# Altium PCB USB_Switch_Board.PcbDoc (part 1 of 2)
Units mm, origin at the board's own origin, x right, y up, seen from the top; angles counter-clockwise.
Board outline 83 x 30 mm, 2 copper layers (Top Layer, Bottom Layer), stack 1.554 mm thick; 73 components, 34 nets, 215 pads, 199 vias.
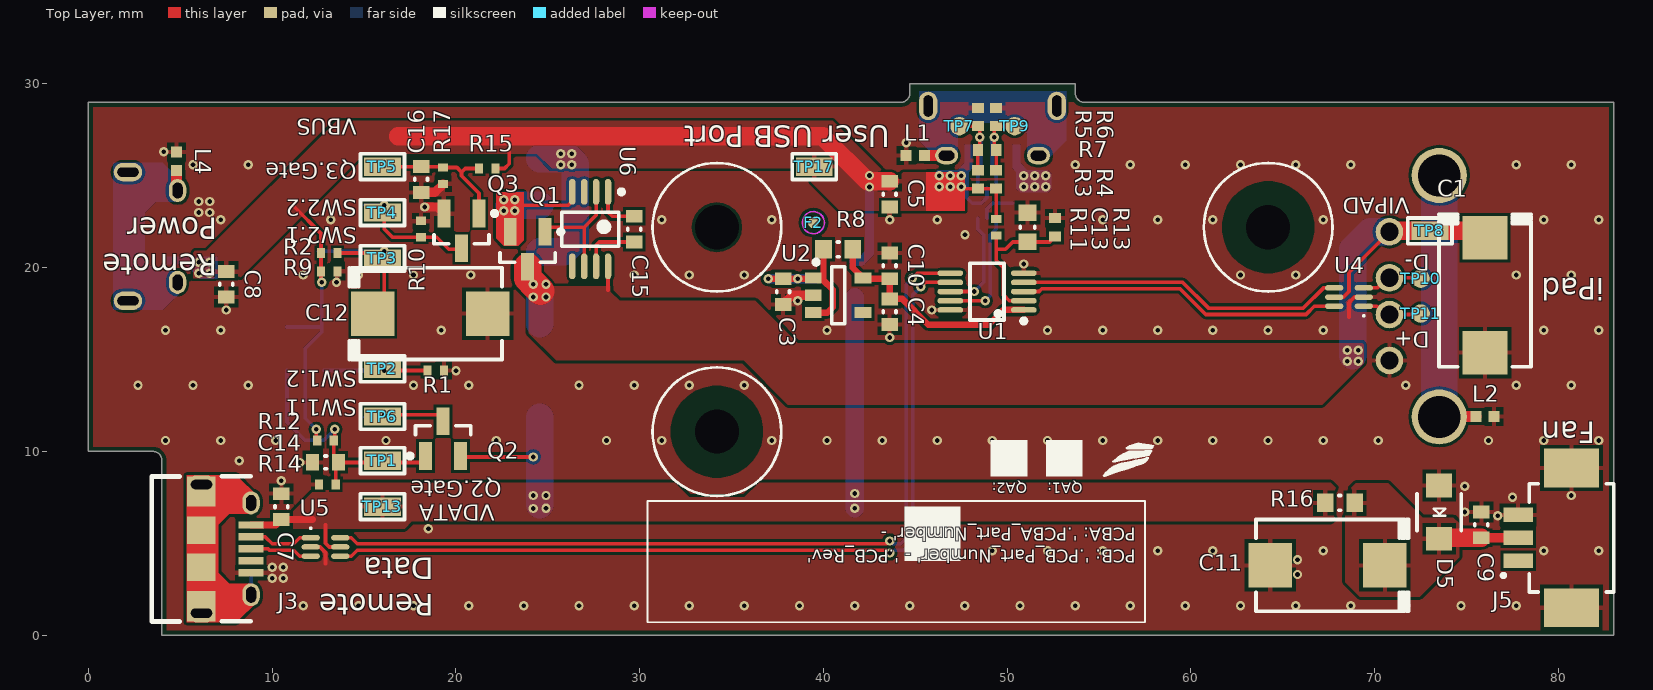
[diagram p0: Top Layer view]
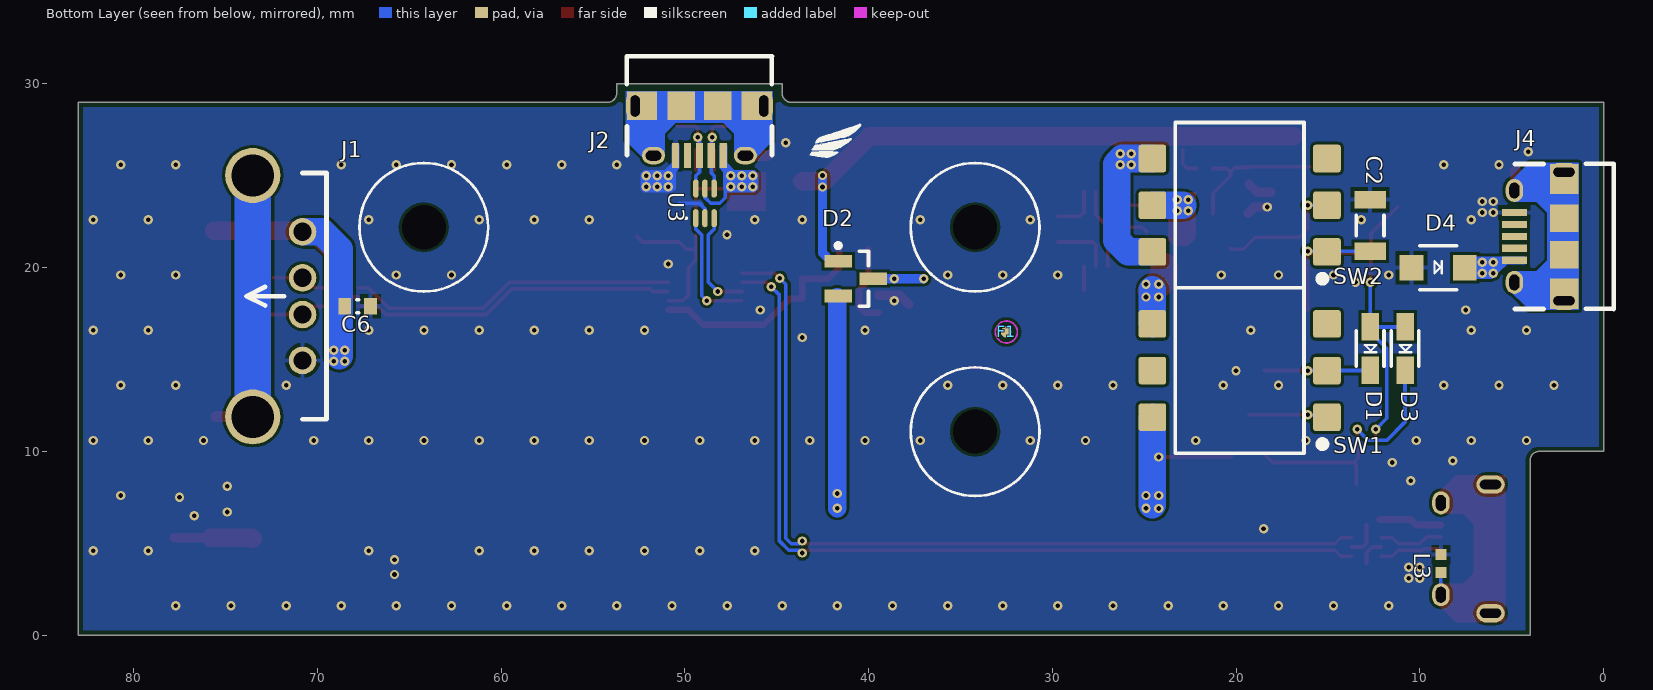
[diagram p1: Bottom Layer view, seen from below]

## Layer stack, top to bottom
Top Solder: solder mask 0.0102, Solder Resist, Dk 3.5
Top Layer: signal copper 0.0356
Dielectric 1: dielectric 1.4834, FR-4, Dk 4.8
Bottom Layer: signal copper 0.0356
Bottom Solder: solder mask 0.0102, Solder Resist, Dk 3.5

## Board outline
4,0 4,9.5 ccw(c3.5,9.5) 3.5,10 0,10 0,29 44.2,29 ccw(c44.2,29.5) 44.7,29.5 44.7,30 53.7,30 53.7,29.5 ccw(c54.2,29.5) 54.2,29 83,29 83,0

## Design rules (kind name [scope] priority, off if disabled: settings)
AcuteAngle [All] p1: minimum=8.90000000000000E+0001 checktracksonly=TRUE
BoardOutlineClearance [All] p1: gap=0.26 ignorepadtopadclearanceinfootprint=FALSE except(0: Text-OutlineEdge Text-CavityEdge Text-CutoutEdge Text-SplitBarrior Text-SplitContinuation)
Clearance [All] p1: gap=0.15 ignorepadtopadclearanceinfootprint=FALSE except(0: Arc-Hole Track-Hole SMDPad-Hole THPad-Hole Via-Hole Fill-Hole Poly-Hole Region-Hole Text-Hole)
ComponentClearance [All] p1: gap=0.3 collisioncheckmode=3 verticalgap=0.3 showdistances=FALSE
DiffPairsRouting [All] p1: maxlimit=0.2 minlimit=0.15 mostfreqgap=0.15 toplayer_minwidth=0.2 toplayer_maxwidth=0.2 toplayer_prefwidth=0.2 bottomlayer_minwidth=0.2 bottomlayer_maxwidth=0.2 bottomlayer_prefwidth=0.2 maxuncoupledlength=12.7
HoleSize [All] p1: absolutevalues=TRUE maxlimit=10 minlimit=0.2 maxpercent=80.000 minpercent=20.000
HoleToHoleClearance [All] p1: gap=0.3 allowstackedmicrovias=FALSE
MinimumSolderMaskSliver [All] p1: minsoldermaskwidth=0.08
PlaneConnect [All] p1: pad.planeconnectstyle=Relief pad.reliefexpansion=0.5 pad.reliefentries=4 pad.reliefconductorwidth=0.25 pad.reliefairgap=0.25 via.planeconnectstyle=Direct via.reliefexpansion=0.508 via.reliefentries=4 via.reliefconductorwidth=0.254 via.reliefairgap=0.254
PolygonConnect [All] p1: thpad.connectstyle=Relief thpad.reliefconductorwidth=0.25 thpad.reliefentries=4 thpad.polygonreliefangle="90 Angle" thpad.airgapwidth=0.2 smdpad.connectstyle=Relief smdpad.reliefconductorwidth=0.25 smdpad.reliefentries=4 smdpad.polygonreliefangle="90 Angle" smdpad.airgapwidth=0.2 via.connectstyle=Direct via.reliefconductorwidth=0.254 via.reliefentries=4 via.polygonreliefangle="90 Angle" via.airgapwidth=0.254
RoutingVias [All] p1: holewidth=0.4 width=0.6 viastyle="Through Hole" minholewidth=0.2 minwidth=0.4 maxholewidth=1.8 maxwidth=2
SilkToSilkClearance [All] p1: silktosilkclearance=0
SilkToSolderMaskClearance [IsPad] p1: minsilkscreentomaskgap=0.025 clearancetoexposedcopper=TRUE
SolderMaskExpansion [All] p1: expansion=0.025
Width [All] p1: maxlimit=10 minlimit=0.13 preferedwidth=0.2
22 further rules are at their usual default settings.

## Classes and differential pairs
differential pair USB_Remote: +USB_Remote_p -USB_Remote_n
differential pair USB_Usr: +USB_Usr_p -USB_Usr_n
differential pair USB_Usr_R: +USB_Usr_R_p -USB_Usr_R_n
differential pair USB_Remote_R: +USB_Remote_R_p -USB_Remote_R_n
differential pair USB_iPad: +USB_iPad_p -USB_iPad_n
differential pair USB_iPad_R: +USB_iPad_R_p -USB_iPad_R_n

## Components (designator, comment, footprint, x,y, rotation, side; value= is the part's Value field where it differs from the comment)
C1 "CAP, 470uF, TANT POLY, 6.3V, ±20%, 2917, SMT" T520W477M006ATE035 76,18.5 r270 top value="470 uF"
C2 "CAP, 22uF, CER, 25V, X5R, ±20%, 1206, SMT" CAPC1206(3216)190_L 12.7,22.3 r90 bottom value=22uF
C3 "CAP, 1uF, CER, 50V, X6S, ±10%, 0603, SMT" CAPC0603(1608)100_L 37.8,18.7 r270 top value=1uF
C4 "CAP, 1uF, CER, 50V, X6S, ±10%, 0603, SMT" CAPC0603(1608)100_L 43.6,17.6 r270 top value=1uF
C5 "CAP, 10uF, CER, 10V, X5R, ±10%, 0603, SMT" CAPC0603(1608)100_L 43.6,24 r270 top value=10uF
C6 "CAP, 10uF, CER, 10V, X5R, ±10%, 0603, SMT" CAPC0603(1608)100_L 67.8,17.9 r180 bottom value=10uF
C7 "CAP, 10uF, CER, 10V, X5R, ±10%, 0603, SMT" CAPC0603(1608)100_L 10.5,7 r90 top value=10uF
C8 "CAP, 10uF, CER, 10V, X5R, ±10%, 0603, SMT" CAPC0603(1608)100_L 7.5,19.1 r270 top value=10uF
C9 "CAP, 10uF, CER, 10V, X5R, ±10%, 0603, SMT" CAPC0603(1608)100_L 75.8,6 r90 top value=10uF
C10 "CAP, 10uF, CER, 10V, X5R, ±10%, 0603, SMT" CAPC0603(1608)100_L 43.6,20.1 r90 top value=10uF
C11 "CAP, 470uF, TANT POLY, 6.3V, ±20%, 2917, SMT" T520W477M006ATE035 67.434,3.8 r180 top value="470 uF"
C12 "CAP, 470uF, TANT POLY, 6.3V, ±20%, 2917, SMT" T520W477M006ATE035 18.6,17.5 r0 top value="470 uF"
C13 "CAP, 1uF, CER, 50V, X6S, ±10%, 0603, SMT" CAPC0603(1608)100_N 51.1,22.2 r90 top value=1uF
C14 "CAP, 4.7uF, CER, 25V, X5R, ±10%, 0603, SMT" CAPC0603(1608)100_L 12.9,9.4 r180 top value=4.7uF
C15 "CAP, 470nF, CER, 25V, X7R, ±10%, 0603, SMT" CAPC0603(1608)100_L 29.7,22.1 r270 top value=470nF
C16 "CAP, 4.7uF, CER, 25V, X5R, ±10%, 0603, SMT" CAPC0603(1608)100_L 18.1,24.8 r270 top value=4.7uF
D1 "DIODE, Schottky, 45V, 0.1A, SOD323, SMT" SOD323 12.7,15.6 r270 bottom
D2 "DIODE, Schottky, Array, 30V, SOT-23-3, SMT" SOT-23-3 40.7,19.4 r180 bottom
D3 "DIODE, Schottky, 45V, 0.1A, SOD323, SMT" SOD323 10.8,15.6 r270 bottom
D4 "DIODE, TVS, 5V, UNI-DIR, SOD123FL, SMT" SOD-123FL 9,20 r180 bottom value=5V
D5 "DIODE, TVS, 5V, UNI-DIR, SOD123FL, SMT" SOD-123FL 73.5,6.7 r270 top value=5V
F1 "Fiducial" FID0.6MM 32.5,16.5 r180 bottom
F2 "Fiducial" FID0.6MM 39.45,22.45 r0 top
J1 "CONN, USB 2.0, RCPT A, RA, HORZ, TH" UE27AC54100 70.8,18.45 r270 bottom locked
J2 "CONN, USB 2.0, Micro B, RA, SMT" 10118194-0001LF 49.2,27.45 r0 bottom locked
J3 "CONN, USB 2.0, Micro B, RA, SMT" 10118194-0001LF 7.5,4.7 r270 top locked
J4 "CONN, USB 2.0, Micro B, RA, SMT" 10118194-0001LF 3.5,21.7 r90 bottom
J5 "CONN, Header, 3-Pos, Shrouded, 1.25mm Pitch, RA, SMT" 0532610371 77.8,4.05 r90 top
L1 "FERRITE, 80 OHM, 0402" "IND 1005 (0402)" 45,26.1 r0 top
L2 "FERRITE, 80 OHM, 0402" "IND 1005 (0402)" 76,11.9 r180 top
L3 "FERRITE, 80 OHM, 0402" "IND 1005 (0402)" 8.85,3.9 r270 bottom
L4 "FERRITE, 80 OHM, 0402" "IND 1005 (0402)" 4.8,25.8 r270 top
Q1 "MOSFET, N-CH, 30V, 6.2A, SOT23" SOT-23-3 23.9,21 r270 top
Q2 "MOSFET, P-CH, 60V, 180mA, SOT-23" SOT-23-3 19.3,10.7 r90 top
Q3 "MOSFET, N-CH, 30V, 6.2A, SOT23" SOT-23-3 20.3,22 r270 top
R1 "RES, 2K, 0.063W, 1%, 0402, SMT" RESC0402(1005)_L 18.9,14.4 r0 top value=2k
R2 "RES, 2K, 0.063W, 1%, 0402, SMT" RESC0402(1005)_L 13.1,20.8 r0 top value=2k
R3 "RES, 82K, 0.063W, 1%, 0402, SMT" RESC0402(1005)_N 48.4,24.8 r270 top value=82k
R4 "RES, 38.3K OHM, 1%, 1/16W, 0402, SMD" RESC0402(1005)_N 49.4,24.8 r270 top value=38.3k
R5 "RES, 47K OHM, 1%, 1/5W, 0402, SMD" RESC0402(1005)_N 48.4,28.2 r270 top value=47k
R6 "RES, 47K OHM, 1%, 1/5W, 0402, SMD" RESC0402(1005)_N 49.4,28.2 r270 top value=47k
R7 "RES, Jumper, 0R, 0.063W, 0402, SMT" RESC0402(1005)_N 48.9,26.4 r180 top value=0R
R8 "RES, 0, 0.1W, 1%, 0603, SMT" RESC0603(1608)_N 40.8,21 r180 top value=0
R9 "RES, 10K, 0.063W, 1%, 0402, SMT" RESC0402(1005)_L 13.1,19.8 r0 top value=10k
R10 "RES, Jumper, 0R, 0.063W, 0402, SMT" RESC0402(1005)_L 18.1,22.1 r270 top value=0R
R11 "RES, 100K, 0.063W, 1%, 0402, SMT" RESC0402(1005)_L 49.4,22.2 r90 top value=100k
R12 "RES, 10K, 0.063W, 1%, 0402, SMT" RESC0402(1005)_L 12.9,10.6 r180 top value=10k
R13 "RES, 200K, 0.063W, 1%, 0402, SMT" RESC0402(1005)_N 52.6,22.2 r270 top value=200k
R14 "RES, 100K, 0.063W, 1%, 0402, SMT" RESC0402(1005)_L 13,8.2 r180 top value=100k
R15 "RES, 100K, 0.063W, 1%, 0402, SMT" RESC0402(1005)_L 21.7,25.4 r180 top value=100k
R16 "RES, 0, 0.1W, 1%, 0603, SMT" RESC0603(1608)_N 68.1,7.2 r0 top value=0
R17 "RES, 100K, 0.063W, 1%, 0402, SMT" RESC0402(1005)_L 19.3,25 r270 top value=100k
SW1 "IC, RELAY, SOLID STATE, 2A, SMT" VO14642AABTR 19.8,14.4 r0 bottom
SW2 "IC, RELAY, SOLID STATE, 2A, SMT" VO14642AABTR 19.8,23.4 r0 bottom
TP1 "TESTPOINT, 0603, SMT" TP0603 16,9.5 r180 top
TP2 "TESTPOINT, 0603, SMT" TP0603 16,14.5 r180 top
TP3 "TESTPOINT, 0603, SMT" TP0603 16,20.5 r180 top
TP4 "TESTPOINT, 0603, SMT" TP0603 16,23 r180 top
TP5 "TESTPOINT, 0603, SMT" TP0603 16,25.5 r180 top
TP6 "TESTPOINT, 0603, SMT" TP0603 16,11.9 r180 top
TP7 "TESTPOINT, 1mm Diam, Round" TP1MM 47.4,27.7 r0 top
TP8 "TESTPOINT, 0603, SMT" TP0603 73,22 r0 top
TP9 "TESTPOINT, 1mm Diam, Round" TP1MM 50.4,27.7 r0 top
TP10 "TESTPOINT, 1mm Diam, Round" TP1MM 72.5,19.4 r90 top
TP11 "TESTPOINT, 1mm Diam, Round" TP1MM 72.5,17.5 r0 top
TP13 "TESTPOINT, 0603, SMT" TP0603 16,7 r0 top
TP17 "TESTPOINT, 0603, SMT" TP0603 39.5,25.5 r180 top
U1 "IC, USB SWITCH, DPDT, 10MSOP, SMT" MSOP10 48.9,18.7 r180 top
U2 "IC, REG, LDO, 3.3V, 250mA, SOT-23, SMT" "DBV (SOT-23)" 40.8,18.5 r0 top
U3 "DIODE, TVS, 5.25VWM, 17VC, SOT666, SMT" SOT-666 48.9,23.5 r90 bottom
U4 "DIODE, TVS, 5.25VWM, 17VC, SOT666, SMT" SOT-666 68.6,18.4 r180 top
U5 "DIODE, TVS, 5.25VWM, 17VC, SOT666, SMT" SOT-666 12.9,4.8 r0 top
U6 "IC, Controller, Smart Diode, MSOP-8, SMT" MSOP8 27.3,22.1 r270 top

## Footprints (in the part's own frame and the unit in brackets; to place one, negate y for a bottom-side part, rotate by r counter-clockwise, add the part's x,y. Pads: shape width x height; smd on the part's side, far side on the other; paste and mask are expansions set on the pad)
10118194-0001LF [mm] "CONN USB MICRO B RECPT SMT R/A, 8.05x5.53mm"
  oval 1x1.55 hole 0.5 slot 1.15 at 90 deg: 0(-3.5,-1.35) 0(3.5,-1.35)
  rect 1.645x1.55 smd: 0(-3.122,-1.35) 0(3.123,-1.35)
  oval 1.25x0.95 hole 0.55 slot 0.85 at 0 deg: 0(-2.5,1.35) 0(2.5,1.35)
  rect 1.5x1.55 smd: 0(-1,-1.35) 0(1,-1.35)
  rect 0.4x1.35 smd: 1(-1.3,1.35) 2(-0.65,1.35) 3(0,1.35) 4(0.65,1.35) 5(1.3,1.35)
  silkscreen extent -3.94,-4.05 3.95,1.33, body extent -4.03,-4.07 4.02,1.46, height 2.73
0532610371 [mm]
  rect 2.1x3 smd: 0(-2.55,-2.9) 0(5.05,-2.9)
  rect 0.8x1.6 smd: 1(0,0) 2(1.25,0) 3(2.5,0)
  silkscreen extent -1.7,-5.2 4.2,0.9, body extent -3.21,-5.04 5.69,0.16, height 3.5
CAPC0603(1608)100_L [mm] "Chip Capacitor, Body 1.6x0.8mm, Height 1.0mm, IPC High Density"
  rect 0.7x0.9 smd: 1(-0.7,0) 2(0.7,0)
  silkscreen extent -0.05,-0.35 0.05,0.35, body extent -0.87,-0.48 0.88,0.48, height 1
CAPC0603(1608)100_N [mm] "Chip Capacitor, Body 1.6x0.8mm, Height 1.0mm, IPC Medium Density"
  rect 0.9x1 smd: 1(-0.8,0) 2(0.8,0)
  silkscreen extent -0.05,-0.4 0.05,0.4, body extent -0.87,-0.48 0.88,0.47, height 1
CAPC1206(3216)190_L [mm] "Chip Capacitor, Body 3.2x1.6mm, Height 1.9mm, IPC High Density"
  rect 0.95x1.7 smd: 1(-1.4,0) 2(1.4,0)
  silkscreen extent -0.55,-0.75 0.55,0.75, body extent -1.7,-0.9 1.7,0.9, height 1.9
"DBV (SOT-23)" [mm]
  rect 0.9x0.6 smd: 1(-1.35,0.95) 2(-1.35,0) 3(-1.35,-0.95) 4(1.35,-0.95) 5(1.35,0.95)
  silkscreen extent -1.32,-1.55 0.35,1.92, body extent -0.9,-1.55 0.9,1.55, height 1.55
FID0.6MM [mm]
  round 0.6 smd paste-5 mask+0.3: 1(0,0)
  Top Layer keep-out circle w0.1: c0,0 r0.6
"IND 1005 (0402)" [mm]
  rect 0.6x0.6 smd: 1(-0.5,0) 2(0.5,0)
  body extent -0.55,-0.32 0.55,0.33, height 0.6
MSOP8 [mm]
  oval 1.4x0.35 smd: 1(-2.025,0.975) 2(-2.025,0.325) 3(-2.025,-0.325) 4(-2.025,-0.975) 5(2.025,-0.975) 6(2.025,-0.325) 7(2.025,0.325) 8(2.025,0.975)
  silkscreen extent -2.15,-1.55 0.93,1.83, body extent -1.55,-1.55 1.55,1.55, height 1.1
MSOP10 [mm]
  oval 1.4x0.3 smd mask+0.12: 1(-2,1) 2(-2,0.5) 3(-2,0) 4(-2,-0.5) 5(-2,-1) 6(2,-1) 7(2,-0.5) 8(2,0) 9(2,0.5) 10(2,1)
  silkscreen extent -2.13,-1.55 0.92,1.72, body extent -1.5,-1.5 1.5,1.5, height 1.2
RESC0402(1005)_L [mm] "Chip Resistor, Body 1.0x0.5mm, IPC High Density"
  rect 0.45x0.55 smd: 1(-0.45,0) 2(0.45,0)
  body extent -0.52,-0.27 0.53,0.28, height 0.4
RESC0402(1005)_N [mm] "Chip Resistor, Body 1.0x0.5mm, IPC Medium Density"
  rect 0.55x0.65 smd: 1(-0.5,0) 2(0.5,0)
  body extent -0.52,-0.27 0.53,0.28, height 0.4
RESC0603(1608)_N [mm] "Chip Resistor, Body 1.6x0.8mm, IPC Medium Density"
  rect 0.9x1 smd: 1(-0.8,0) 2(0.8,0)
  silkscreen extent -0.05,-0.4 0.05,0.4, body extent -0.85,-0.47 0.85,0.47, height 0.6
SOD323 [mm]
  rect 1.5x0.95 smd: 1(-1.175,0) 2(1.175,0)
  silkscreen extent -0.95,-0.75 0.95,0.75, body extent -0.99,-0.69 0.97,0.71, height 1.1
SOD-123FL [mm]
  rect 1.3x1.4 smd: 1(1.45,0) 2(-1.45,0)
  silkscreen extent -1,-1.2 1,1.2, body extent -1.45,-1 1.45,1, height 1.2
SOT-23-3 [mm]
  rect 1.5x0.7 smd: 1(-0.95,0.95) 2(-0.95,-0.95) 3(0.95,0)
  silkscreen extent -1.08,-1.5 0.7,1.92, body extent -0.7,-1.52 0.7,1.53, height 1.12
SOT-666 [mm]
  oval 0.99x0.3 smd: 1(-0.805,0.5) 2(-0.805,0) 3(-0.805,-0.5) 4(0.805,-0.5) 5(0.805,0) 6(0.805,0.5)
  silkscreen extent -0.85,0.97 -0.76,1.07, body extent -0.65,-0.85 0.65,0.85, height 0.6
T520W477M006ATE035 [mm] "2917, KEMET Size W"
  rect 2.37x2.43 smd: 1(-3.12,0) 2(3.12,0)
  silkscreen extent -4.4,-2.5 3.9,2.5, body extent -3.8,-2.3 3.8,2.3, height 1.61
TP1MM [mm] "Test Point 1MM"
  round 1 smd paste-10: 1(0,0)
TP0603 [mm]
  rect 2x1 smd: 1(0,0)
  silkscreen extent -1.2,-0.7 1.2,0.7, body extent -0.8,-0.46 0.8,0.44, height 1.17
UE27AC54100 [mm] "*"
  round 3 hole 2.3: 0(-6.57,-2.71) 0(6.57,-2.71)
  round 1.5 hole 1: 1(-3.5,0) 2(-1,0) 3(1,0) 4(3.5,0)
  silkscreen extent -6.7,-3.05 6.7,1.3, body extent -7.42,-13 7.42,0.8, height 7.7
VO14642AABTR [mm]
  rrect17% 1.5x1.5 smd: 1(-4.75,2.54) 2(-4.75,0) 3(-4.75,-2.54) 4(4.75,-2.54) 5(4.75,0) 6(4.75,2.54)
  silkscreen extent -4.62,-4.5 3.5,4.5, body extent -5.15,-4.3 5.15,4.3, height 4.48

## Part data
C1 C11 C12: library part KH10972, Capacitance (Unit Value)="uF 470", ESR (Unit Value)="mOhm 35", Manufacturer1=KEMET, Manufacturer_Part_Number1=T520W477M006ATE035, Package=2917, Tolerance (+/-%)=20, Type (Capacitor)=Tantalum, Voltage=6.300, Bom_View=https://app.bom.com/a/VDW2CJ2J2LKCPUI4?v=bom.indented, Costing_View=https://app.bom.com/a/VDW2CJ2J2LKCPUI4?v=costing.summary, Distributor1=Digi-Key, Distributor_Part_Number1=399-11982-6-ND, Files_View=https://app.bom.com/a/VDW2CJ2J2LKCPUI4?v=files.associations, Height (mm)=1.500, Item_Phase=Preliminary, Mounting Technology="Surface Mount (SMT)", Part_Name="CAP, 470uF, TANT POLY, 6.3V, ±20%, 2917, SMT", Part_Number=KH10972, Part_Type=Capacitor, SchLibComponentName=CAP_POL, Sourcing_View=https://app.bom.com/a/VDW2CJ2J2LKCPUI4?v=sourcing.relationships, Specs_View=https://app.bom.com/a/VDW2CJ2J2LKCPUI4?v=spec.summary
C2: library part KH10501, "...", Capacitance (Unit Value)="uF 22", Current (Unit Value)=CAP, Manufacturer1="TDK Corporation", Manufacturer_Part_Number1=C3216X5R1E226M160AB, Package=1206, rated_voltage_temp=25, Tolerance (+/-%)=20, Type (Capacitor)=Ceramic, Voltage=25.000, Bom_View=https://app.bom.com/a/XFY4EL4L4NMU28VA?v=bom.indented, Costing_View=https://app.bom.com/a/XFY4EL4L4NMU28VA?v=costing.summary, Files_View=https://app.bom.com/a/XFY4EL4L4NMU28VA?v=files.associations, Item_Phase=Production, Mounting Technology="Surface Mount (SMT)", Part_Name="CAP, 22uF, CER, 25V, X5R, ±20%, 1206, SMT", Part_Number=KH10501, Part_Type=Capacitor, Rated Voltage=25, revision=1, SchLibComponentName=CAP, Sourcing_View=https://app.bom.com/a/XFY4EL4L4NMU28VA?v=sourcing.relationships, Specs_View=https://app.bom.com/a/XFY4EL4L4NMU28VA?v=spec.summary
C3 C4 C13: library part KH10492, "...", Capacitance (Unit Value)="uF 1", Current (Unit Value)=CAP, Manufacturer1="TDK Corporation", Manufacturer_Part_Number1=C1608X6S1H105K080AC, Package=0603, rated_voltage_temp=50, Tolerance (+/-%)=10, Type (Capacitor)=Ceramic, Voltage=50.000, Bom_View=https://app.bom.com/a/O6PV5CVCVEDLTZME?v=bom.indented, Costing_View=https://app.bom.com/a/O6PV5CVCVEDLTZME?v=costing.summary, Files_View=https://app.bom.com/a/O6PV5CVCVEDLTZME?v=files.associations, Item_Phase=Production, Mounting Technology="Surface Mount (SMT)", Part_Name="CAP, 1uF, CER, 50V, X6S, ±10%, 0603, SMT", Part_Number=KH10492, Part_Type=Capacitor, Rated Voltage=50, revision=1, SchLibComponentName=CAP, Sourcing_View=https://app.bom.com/a/O6PV5CVCVEDLTZME?v=sourcing.relationships, Specs_View=https://app.bom.com/a/O6PV5CVCVEDLTZME?v=spec.summary
C5 C6 C7 C8 C9 C10: library part KH10478, "...", Capacitance (Unit Value)="uF 10", Current (Unit Value)=CAP, Manufacturer1=Yageo, Manufacturer_Part_Number1=C1608X5R1A106K080AC, Package=0603, rated_voltage_temp=10, Type (Capacitor)=Ceramic, Voltage=10.000, Bom_View=https://app.bom.com/a/ASBHRYHYH0Z7FL9M?v=bom.indented, Costing_View=https://app.bom.com/a/ASBHRYHYH0Z7FL9M?v=costing.summary, Files_View=https://app.bom.com/a/ASBHRYHYH0Z7FL9M?v=files.associations, Item_Phase=Production, Mounting Technology="Surface Mount (SMT)", Part_Name="CAP, 10uF, CER, 10V, X5R, ±10%, 0603, SMT", Part_Number=KH10478, Part_Type=Capacitor, Rated Voltage=10, revision=1, SchLibComponentName=CAP, Sourcing_View=https://app.bom.com/a/ASBHRYHYH0Z7FL9M?v=sourcing.relationships, Specs_View=https://app.bom.com/a/ASBHRYHYH0Z7FL9M?v=spec.summary, Tolerance (+/-%)=10
C14 C16: library part KH10511, "...", Capacitance (Unit Value)="uF 4.7", Current (Unit Value)=CAP, Manufacturer1="Murata Electronics North America", Manufacturer_Part_Number1=GRM188R61E475KE11D, Package=0603, rated_voltage_temp=25, Tolerance (+/-%)=10, Type (Capacitor)=Ceramic, Voltage=25.000, Bom_View=https://app.bom.com/a/8Q9FPWFWFYX5DJ6S?v=bom.indented, Costing_View=https://app.bom.com/a/8Q9FPWFWFYX5DJ6S?v=costing.summary, Files_View=https://app.bom.com/a/8Q9FPWFWFYX5DJ6S?v=files.associations, Item_Phase=Production, Mounting Technology="Surface Mount (SMT)", Part_Name="CAP, 4.7uF, CER, 25V, X5R, ±10%, 0603, SMT", Part_Number=KH10511, Part_Type=Capacitor, Rated Voltage=25, revision=1, SchLibComponentName=CAP, Sourcing_View=https://app.bom.com/a/8Q9FPWFWFYX5DJ6S?v=sourcing.relationships, Specs_View=https://app.bom.com/a/8Q9FPWFWFYX5DJ6S?v=spec.summary
C15: library part KH10515, "...", Capacitance (Unit Value)="nF 470", Current (Unit Value)=CAP, Manufacturer1=AVX, Manufacturer_Part_Number1=06033C474KAT2A, Package=0603, rated_voltage_temp=25, Tolerance (+/-%)=10, Type (Capacitor)=Ceramic, Voltage=25.000, Bom_View=https://app.bom.com/a/CUDJT0J0J219HNA3?v=bom.indented, Costing_View=https://app.bom.com/a/CUDJT0J0J219HNA3?v=costing.summary, Files_View=https://app.bom.com/a/CUDJT0J0J219HNA3?v=files.associations, Item_Phase=Production, Mounting Technology="Surface Mount (SMT)", Part_Name="CAP, 470nF, CER, 25V, X7R, ±10%, 0603, SMT", Part_Number=KH10515, Part_Type=Capacitor, Rated Voltage=25, revision=1, SchLibComponentName=CAP, Sourcing_View=https://app.bom.com/a/CUDJT0J0J219HNA3?v=sourcing.relationships, Specs_View=https://app.bom.com/a/CUDJT0J0J219HNA3?v=spec.summary
D1 D3: library part KH10397, "..", Current (Unit Value)="mA 100", Manufacturer1="Diodes Incorporated", Manufacturer_Part_Number1=SDM10K45-7-F, Voltage - Forward (V)=0.450, Voltage - Reverse (V)=45.000, Bom_View=https://app.bom.com/a/0I17HO7O7QPX5B11?v=bom.indented, Costing_View=https://app.bom.com/a/0I17HO7O7QPX5B11?v=costing.summary, Files_View=https://app.bom.com/a/0I17HO7O7QPX5B11?v=files.associations, Item_Phase=Production, Mounting Technology="Surface Mount (SMT)", Part_Name="DIODE, Schottky, 45V, 0.1A, SOD323, SMT", Part_Number=KH10397, Part_Type=Diode, revision=1, SchLibComponentName=DIODE_SCHOTTKY, Sourcing_View=https://app.bom.com/a/0I17HO7O7QPX5B11?v=sourcing.relationships, Specs_View=https://app.bom.com/a/0I17HO7O7QPX5B11?v=spec.summary, Type (Diode)=Schottky
D2: library part KH10976, Current (Unit Value)="mA 200", Manufacturer1="Diodes Incorporated", Manufacturer_Part_Number1=BAT54C-7-F, Package=SOT-23-3, Voltage - Forward (V)=0.800, Voltage - Reverse (V)=30.000, Bom_View=https://app.bom.com/a/GYHNX4N4N65XJOXB?v=bom.indented, Costing_View=https://app.bom.com/a/GYHNX4N4N65XJOXB?v=costing.summary, Distributor1=Digi-Key, Distributor_Part_Number1=BAT54C-FDIDKR-ND, Files_View=https://app.bom.com/a/GYHNX4N4N65XJOXB?v=files.associations, Height (mm)=1.200, Item_Phase=Preliminary, Mounting Technology="Surface Mount (SMT)", Part_Name="DIODE, Schottky, Array, 30V, SOT-23-3, SMT", Part_Number=KH10976, Part_Type=Diode, SchLibComponentName=SS8P6C-M3/86A, Sourcing_View=https://app.bom.com/a/GYHNX4N4N65XJOXB?v=sourcing.relationships, Specs_View=https://app.bom.com/a/GYHNX4N4N65XJOXB?v=spec.summary, Type (Diode)=Schottky
D4 D5: library part KH10968, Manufacturer1="Littlefuse Inc.", Manufacturer_Part_Number1=SMF5.0A, Package=SOD-123FL, Bom_View=https://app.bom.com/a/I0JPZ6P6P87ZHEEI?v=bom.indented, Costing_View=https://app.bom.com/a/I0JPZ6P6P87ZHEEI?v=costing.summary, Distributor1=Digi-Key, Distributor_Part_Number1=F5748DKR-ND, Files_View=https://app.bom.com/a/I0JPZ6P6P87ZHEEI?v=files.associations, Item_Phase=Preliminary, Mounting Technology="Surface Mount (SMT)", Part_Name="DIODE, TVS, 5V, UNI-DIR, SOD123FL, SMT", Part_Number=KH10968, Part_Type=Diode, SchLibComponentName=DIODE_TVS, Sourcing_View=https://app.bom.com/a/I0JPZ6P6P87ZHEEI?v=sourcing.relationships, Specs_View=https://app.bom.com/a/I0JPZ6P6P87ZHEEI?v=spec.summary, Type (Diode)=TVS
F1 F2: library part KH10246, "...", Bom_View=https://app.bom.com/a/UCV1BI1I1KJRZ5ZW?v=bom.indented, Costing_View=https://app.bom.com/a/UCV1BI1I1KJRZ5ZW?v=costing.summary, Files_View=https://app.bom.com/a/UCV1BI1I1KJRZ5ZW?v=files.associations, Item_Phase=Preliminary, Mounting Technology=Other, Part_Name=Fiducial, Part_Number=KH10246, Part_Type="Misc Electrical", revision=A, SchLibComponentName=FID, Sourcing_View=https://app.bom.com/a/UCV1BI1I1KJRZ5ZW?v=sourcing.relationships, Specs_View=https://app.bom.com/a/UCV1BI1I1KJRZ5ZW?v=spec.summary
J1: library part KH10969, Manufacturer1="Amphenol Commercial Products", Manufacturer_Part_Number1=UE27AC54100, Bom_View=https://app.bom.com/a/CUDJT0J0J21TB7WD?v=bom.indented, Conductors=4, Costing_View=https://app.bom.com/a/CUDJT0J0J21TB7WD?v=costing.summary, Distributor1=Digi-Key, Distributor_Part_Number1=UE27AC54100-ND, Files_View=https://app.bom.com/a/CUDJT0J0J21TB7WD?v=files.associations, Height (mm)=7.200, Item_Phase=Preliminary, Locking=No, Mounting Technology="Through Hole", Part_Name="CONN, USB 2.0, RCPT A, RA, HORZ, TH", Part_Number=KH10969, Part_Type=Connector, SchLibComponentName=USB_Type_A, Shielded=Yes, Sourcing_View=https://app.bom.com/a/CUDJT0J0J21TB7WD?v=sourcing.relationships, Specs_View=https://app.bom.com/a/CUDJT0J0J21TB7WD?v=spec.summary, Type (Connector)="USB 2.0 A"
J2 J3 J4: library part KH10298, ".", Manufacturer1=Amphenol, Manufacturer_Part_Number1=10118194-0001LF, Bom_View=https://app.bom.com/a/BTCISZIZI108GMFO?v=bom.indented, Conductors=5, Costing_View=https://app.bom.com/a/BTCISZIZI108GMFO?v=costing.summary, Files_View=https://app.bom.com/a/BTCISZIZI108GMFO?v=files.associations, Item_Phase=Production, Locking=No, Mounting Technology="Surface Mount (SMT)", Part_Name="CONN, USB 2.0, Micro B, RA, SMT", Part_Number=KH10298, Part_Type=Connector, revision=1, Rows=1, SchLibComponentName=10118194-0001LF, Shielded=Yes, Sourcing_View=https://app.bom.com/a/BTCISZIZI108GMFO?v=sourcing.relationships, Specs_View=https://app.bom.com/a/BTCISZIZI108GMFO?v=spec.summary, Type (Connector)="USB 2.0 Micro B"
J5: library part KH10793, Bom_View=https://app.bom.com/a/0I17HO7O7QPTCBT2?v=bom.indented, Conductors=3, Costing_View=https://app.bom.com/a/0I17HO7O7QPTCBT2?v=costing.summary, Files_View=https://app.bom.com/a/0I17HO7O7QPTCBT2?v=files.associations, Height (mm)=3.400, Item_Phase=Preliminary, Locking=No, Mounting Technology="Surface Mount (SMT)", Part_Name="CONN, Header, 3-Pos, Shrouded, 1.25mm Pitch, RA, SMT", Part_Number=KH10793, Part_Type=Connector, Pin Pitch (mm)=1.25, Plating Material=Tin, SchLibComponentName=CONN3, Sourcing_View=https://app.bom.com/a/0I17HO7O7QPTCBT2?v=sourcing.relationships, Specs_View=https://app.bom.com/a/0I17HO7O7QPTCBT2?v=spec.summary, Type (Connector)=Header
L1 L2 L3 L4: library part KH10117, "..", Inductance (Unit Value)=N/A, Manufacturer1="Murata Electronics North America", Manufacturer_Part_Number1=BLM15PX800SN1D, Type (Inductor)=Ferrite, Bom_View=https://app.bom.com/a/3L4AKRARATS08DVL?v=bom.indented, Costing_View=https://app.bom.com/a/3L4AKRARATS08DVL?v=costing.summary, Files_View=https://app.bom.com/a/3L4AKRARATS08DVL?v=files.associations, Item_Phase=Production, Mounting Technology="Surface Mount (SMT)", Part_Name="FERRITE, 80 OHM, 0402", Part_Number=KH10117, Part_Type=Inductor, revision=1, SchLibComponentName=FERRITE, Sourcing_View=https://app.bom.com/a/3L4AKRARATS08DVL?v=sourcing.relationships, Specs_View=https://app.bom.com/a/3L4AKRARATS08DVL?v=spec.summary
Q1 Q3: library part KH10792, Current (Unit Value)="A 6.3", Manufacturer1="Diodes Incorporated", Manufacturer_Part_Number1=DMN3023L-7, Package=SOT23, Bom_View=https://app.bom.com/a/CUDJT0J0J215OOBA?v=bom.indented, Costing_View=https://app.bom.com/a/CUDJT0J0J215OOBA?v=costing.summary, Distributor1=Digi-Key, Distributor_Part_Number1=DMN3023L-7DIDKR-ND, Files_View=https://app.bom.com/a/CUDJT0J0J215OOBA?v=files.associations, Height (mm)=1.200, Item_Phase=Production, Mounting Technology="Surface Mount (SMT)", Part_Name="MOSFET, N-CH, 30V, 6.2A, SOT23", Part_Number=KH10792, Part_Type=Transistor, revision=1, SchLibComponentName=NFET, Sourcing_View=https://app.bom.com/a/CUDJT0J0J215OOBA?v=sourcing.relationships, Specs_View=https://app.bom.com/a/CUDJT0J0J215OOBA?v=spec.summary, Type (Transistor)="FET (N-CH)"
Q2: library part KH10356, "..", Manufacturer1="Fairchild Semiconductor", Manufacturer_Part_Number1=NDS0605, Bom_View=https://app.bom.com/a/XFY4EL4L4NMU28ZE?v=bom.indented, Costing_View=https://app.bom.com/a/XFY4EL4L4NMU28ZE?v=costing.summary, Files_View=https://app.bom.com/a/XFY4EL4L4NMU28ZE?v=files.associations, Item_Phase=Production, Mounting Technology="Surface Mount (SMT)", Part_Name="MOSFET, P-CH, 60V, 180mA, SOT-23", Part_Number=KH10356, Part_Type=Transistor, revision=1, SchLibComponentName=PFET, Sourcing_View=https://app.bom.com/a/XFY4EL4L4NMU28ZE?v=sourcing.relationships, Specs_View=https://app.bom.com/a/XFY4EL4L4NMU28ZE?v=spec.summary, Type (Transistor)="FET (P-CH)"
R1 R2: library part KH10444, ". .", Manufacturer1=Vishay, Manufacturer_Part_Number1=CRCW04022K00FKED, Manufacturer_Part_Number2=CRCW04022K00FKEE, Package=0402, Power (Unit Value)="mW 63", Resistance (Unit Value)="k 2", Tolerance (+/-%)=1, Type (Resistor)=Standard, Bom_View=https://app.bom.com/a/CUDJT0J0J219HNC5?v=bom.indented, Costing_View=https://app.bom.com/a/CUDJT0J0J219HNC5?v=costing.summary, Files_View=https://app.bom.com/a/CUDJT0J0J219HNC5?v=files.associations, Item_Phase=Production, Manufacturer2=Vishay, Mounting Technology="Surface Mount (SMT)", Part_Name="RES, 2K, 0.063W, 1%, 0402, SMT", Part_Number=KH10444, Part_Type=Resistor, revision=1, SchLibComponentName=RES, Sourcing_View=https://app.bom.com/a/CUDJT0J0J219HNC5?v=sourcing.relationships, Specs_View=https://app.bom.com/a/CUDJT0J0J219HNC5?v=spec.summary
R3: library part KH10891, Manufacturer1="Vishay Dale", Manufacturer2=Yageo, Manufacturer_Part_Number1=CRCW040282K0FKED, Manufacturer_Part_Number2=RC0402FR-0782KL, Package=0402, Power (Unit Value)="m 63", Resistance (Unit Value)="k 82", Tolerance (+/-%)=1, Type (Resistor)=Standard, Bom_View=https://app.bom.com/a/FXGMW3M3M543Y0NF?v=bom.indented, Costing_View=https://app.bom.com/a/FXGMW3M3M543Y0NF?v=costing.summary, Distributor1=Digi-Key, Distributor2=Digi-Key, Distributor_Part_Number1=541-82.0KLDKR-ND, Distributor_Part_Number2=311-82.0KLRCT-ND, Files_View=https://app.bom.com/a/FXGMW3M3M543Y0NF?v=files.associations, Item_Phase=Production, Mounting Technology="Surface Mount (SMT)", Part_Name="RES, 82K, 0.063W, 1%, 0402, SMT", Part_Number=KH10891, Part_Type=Resistor, Prod_Cost=.0056, revision=1, SchLibComponentName=RES, Sourcing_View=https://app.bom.com/a/FXGMW3M3M543Y0NF?v=sourcing.relationships, Specs_View=https://app.bom.com/a/FXGMW3M3M543Y0NF?v=spec.summary
R4: library part KH10977, Manufacturer1=Yageo, Manufacturer_Part_Number1=RC0402FR-0738K3L, Package=0402, Power (Unit Value)="W 1/16", Resistance (Unit Value)="kOhm 38.3", Tolerance (+/-%)=1, Type (Resistor)=Standard, Bom_View=https://app.bom.com/a/8Q9FPWFWFYXPBGDJ?v=bom.indented, Costing_View=https://app.bom.com/a/8Q9FPWFWFYXPBGDJ?v=costing.summary, Distributor1=Digi-Key, Distributor_Part_Number1=YAG3141DKR-ND, Files_View=https://app.bom.com/a/8Q9FPWFWFYXPBGDJ?v=files.associations, Height (mm)=0.400, Item_Phase=Preliminary, Mounting Technology="Surface Mount (SMT)", Part_Name="RES, 38.3K OHM, 1%, 1/16W, 0402, SMD", Part_Number=KH10977, Part_Type=Resistor, SchLibComponentName=RES, Sourcing_View=https://app.bom.com/a/8Q9FPWFWFYXPBGDJ?v=sourcing.relationships, Specs_View=https://app.bom.com/a/8Q9FPWFWFYXPBGDJ?v=spec.summary
R5 R6: library part KH10805, ".", Manufacturer1="Vishay Dale", Manufacturer_Part_Number1=CRCW040247K0FKEDHP, Package=0402, Power (Unit Value)="W 1/5", Resistance (Unit Value)="kOhm 47", Tolerance (+/-%)=1, Type (Resistor)=Standard, Bom_View=https://app.bom.com/a/SATZ9GZGZIHLRHV6?v=bom.indented, Costing_View=https://app.bom.com/a/SATZ9GZGZIHLRHV6?v=costing.summary, Distributor1=Digi-Key, Distributor_Part_Number1=541-47.0KYCT-ND, Files_View=https://app.bom.com/a/SATZ9GZGZIHLRHV6?v=files.associations, Height (mm)=0.400, Item_Phase=Production, Mounting Technology="Surface Mount (SMT)", Part_Name="RES, 47K OHM, 1%, 1/5W, 0402, SMD", Part_Number=KH10805, Part_Type=Resistor, revision=1, SchLibComponentName=RES, Sourcing_View=https://app.bom.com/a/SATZ9GZGZIHLRHV6?v=sourcing.relationships, Specs_View=https://app.bom.com/a/SATZ9GZGZIHLRHV6?v=spec.summary
R7 R10: library part KH10412, ".", Manufacturer1="Samsung Electro-Mechanics", Manufacturer2=Yageo, Manufacturer_Part_Number1=RC1005J000CS, Manufacturer_Part_Number2=RC0402JR-070RL, Package=0402, Power (Unit Value)="mW 63", Resistance (Unit Value)="R 0", Type (Resistor)=Jumper, Bom_View=https://app.bom.com/a/FXGMW3M3M54CKQGV?v=bom.indented, Costing_View=https://app.bom.com/a/FXGMW3M3M54CKQGV?v=costing.summary, Distributor1=Digi-Key, Distributor2=Digi-Key, Distributor_Part_Number1=1276-3480-1-ND, Distributor_Part_Number2=311-0.0JRCT-ND, Files_View=https://app.bom.com/a/FXGMW3M3M54CKQGV?v=files.associations, Item_Phase=Production, Mounting Technology="Surface Mount (SMT)", Part_Name="RES, Jumper, 0R, 0.063W, 0402, SMT", Part_Number=KH10412, Part_Type=Resistor, revision=2, SchLibComponentName=RES, Sourcing_View=https://app.bom.com/a/FXGMW3M3M54CKQGV?v=sourcing.relationships, Specs_View=https://app.bom.com/a/FXGMW3M3M54CKQGV?v=spec.summary
R8 R16: library part KH10965, Manufacturer1="Panasonic Electronic Components", Manufacturer_Part_Number1=ERJ-3GEY0R00V, Package=0603, Power (Unit Value)="W 0.1", Resistance (Unit Value)="Ohm 0", Type (Resistor)=Jumper, Bom_View=https://app.bom.com/a/WEX3DK3K3MLE4SN7?v=bom.indented, Costing_View=https://app.bom.com/a/WEX3DK3K3MLE4SN7?v=costing.summary, Distributor1=Digi-Key, Distributor_Part_Number1=P0.0GDKR-ND, Files_View=https://app.bom.com/a/WEX3DK3K3MLE4SN7?v=files.associations, Mounting Technology="Surface Mount (SMT)", Part_Name="RES, 0, 0.1W, 1%, 0603, SMT", Part_Number=KH10965, Part_Type=Resistor, SchLibComponentName=RES, Sourcing_View=https://app.bom.com/a/WEX3DK3K3MLE4SN7?v=sourcing.relationships, Specs_View=https://app.bom.com/a/WEX3DK3K3MLE4SN7?v=spec.summary
  R8: Item_Phase=Design, revision=A
  R16: Item_Phase=Preliminary
R9 R12: library part KH10420, ". .", Manufacturer1=Panasonic, Manufacturer2=Vishay, Manufacturer_Part_Number1=ERJ-2RKF1002X, Manufacturer_Part_Number2=CRCW040210K0FKED, Package=0402, Power (Unit Value)="mW 63", Resistance (Unit Value)="k 10", Tolerance (+/-%)=1, Type (Resistor)=Standard, Bom_View=https://app.bom.com/a/O6PV5CVCVEDLTZOG?v=bom.indented, Costing_View=https://app.bom.com/a/O6PV5CVCVEDLTZOG?v=costing.summary, Files_View=https://app.bom.com/a/O6PV5CVCVEDLTZOG?v=files.associations, Item_Phase=Production, Mounting Technology="Surface Mount (SMT)", Part_Name="RES, 10K, 0.063W, 1%, 0402, SMT", Part_Number=KH10420, Part_Type=Resistor, revision=1, SchLibComponentName=RES, Sourcing_View=https://app.bom.com/a/O6PV5CVCVEDLTZOG?v=sourcing.relationships, Specs_View=https://app.bom.com/a/O6PV5CVCVEDLTZOG?v=spec.summary
R11 R14 R15 R17: library part KH10416, ". .", Manufacturer1=Panasonic, Manufacturer2=Vishay, Manufacturer_Part_Number1=ERJ-2RKF1003X, Manufacturer_Part_Number2=CRCW0402100KFKED, Package=0402, Power (Unit Value)="mW 63", Resistance (Unit Value)="k 100", Tolerance (+/-%)=1, Type (Resistor)=Standard, Bom_View=https://app.bom.com/a/K2LR18R8RA9HPVKH?v=bom.indented, Costing_View=https://app.bom.com/a/K2LR18R8RA9HPVKH?v=costing.summary, Files_View=https://app.bom.com/a/K2LR18R8RA9HPVKH?v=files.associations, Item_Phase=Production, Mounting Technology="Surface Mount (SMT)", Part_Name="RES, 100K, 0.063W, 1%, 0402, SMT", Part_Number=KH10416, Part_Type=Resistor, revision=1, SchLibComponentName=RES, Sourcing_View=https://app.bom.com/a/K2LR18R8RA9HPVKH?v=sourcing.relationships, Specs_View=https://app.bom.com/a/K2LR18R8RA9HPVKH?v=spec.summary
R13: library part KH10438, ". .", Manufacturer1=Vishay, Manufacturer2=Yageo, Manufacturer_Part_Number1=CRCW0402200KFKED, Manufacturer_Part_Number2=RC0402FR-07200KL, Package=0402, Power (Unit Value)="mW 63", Resistance (Unit Value)="k 200", Tolerance (+/-%)=1, Type (Resistor)=Standard, Bom_View=https://app.bom.com/a/6O7DNUDUDWV3BH6N?v=bom.indented, Costing_View=https://app.bom.com/a/6O7DNUDUDWV3BH6N?v=costing.summary, Files_View=https://app.bom.com/a/6O7DNUDUDWV3BH6N?v=files.associations, Item_Phase=Production, Mounting Technology="Surface Mount (SMT)", Part_Name="RES, 200K, 0.063W, 1%, 0402, SMT", Part_Number=KH10438, Part_Type=Resistor, revision=1, SchLibComponentName=RES, Sourcing_View=https://app.bom.com/a/6O7DNUDUDWV3BH6N?v=sourcing.relationships, Specs_View=https://app.bom.com/a/6O7DNUDUDWV3BH6N?v=spec.summary
SW1 SW2: library part KH10967, Manufacturer1="Vishay Dale", Manufacturer_Part_Number1=VO14642AABTR, Bom_View=https://app.bom.com/a/EWFLV2L2L43WK0UD?v=bom.indented, Costing_View=https://app.bom.com/a/EWFLV2L2L43WK0UD?v=costing.summary, Distributor1=Digi-Key, Distributor_Part_Number1=VO14642AABDKR-ND, Files_View=https://app.bom.com/a/EWFLV2L2L43WK0UD?v=files.associations, Item_Phase=Preliminary, Mounting Technology="Surface Mount (SMT)", Part_Name="IC, RELAY, SOLID STATE, 2A, SMT", Part_Number=KH10967, Part_Type=IC, Power (Unit Value)=VO14642AABTR, SchLibComponentName=NFET, Sourcing_View=https://app.bom.com/a/EWFLV2L2L43WK0UD?v=sourcing.relationships, Specs_View=https://app.bom.com/a/EWFLV2L2L43WK0UD?v=spec.summary, Type (IC)=Power
TP1 TP2 TP3 TP4 TP5 TP6 TP8 TP13 TP17: library part KH10245, "..", Manufacturer1="TE Connectivity", Manufacturer_Part_Number1=RCU-0C, Bom_View=https://app.bom.com/a/TBU0AH0H0JIQY4YI?v=bom.indented, Costing_View=https://app.bom.com/a/TBU0AH0H0JIQY4YI?v=costing.summary, Files_View=https://app.bom.com/a/TBU0AH0H0JIQY4YI?v=files.associations, Item_Phase=Production, Mounting Technology="Surface Mount (SMT)", Part_Name="TESTPOINT, 0603, SMT", Part_Number=KH10245, Part_Type="Misc Electrical", revision=1, SchLibComponentName=TP_RECT, Sourcing_View=https://app.bom.com/a/TBU0AH0H0JIQY4YI?v=sourcing.relationships, Specs_View=https://app.bom.com/a/TBU0AH0H0JIQY4YI?v=spec.summary
TP7 TP9 TP10 TP11: library part KH10379, "...", Bom_View=https://app.bom.com/a/L3MS29S9SBAIQWMP?v=bom.indented, Costing_View=https://app.bom.com/a/L3MS29S9SBAIQWMP?v=costing.summary, Files_View=https://app.bom.com/a/L3MS29S9SBAIQWMP?v=files.associations, Item_Phase=Preliminary, Mounting Technology=Other, Part_Name="TESTPOINT, 1mm Diam, Round", Part_Number=KH10379, Part_Type="Misc Electrical", revision=A, SchLibComponentName=TP, Sourcing_View=https://app.bom.com/a/L3MS29S9SBAIQWMP?v=sourcing.relationships, Specs_View=https://app.bom.com/a/L3MS29S9SBAIQWMP?v=spec.summary
U1: library part KH10970, Manufacturer1="On Semiconductor", Manufacturer_Part_Number1=FSUSB42MUX, Package=10MSOP, Bom_View=https://app.bom.com/a/CUDJT0J0J21TB6ZH?v=bom.indented, Costing_View=https://app.bom.com/a/CUDJT0J0J21TB6ZH?v=costing.summary, Distributor1=Digi-Key, Distributor_Part_Number1=FSUSB42MUXDKR-ND, Files_View=https://app.bom.com/a/CUDJT0J0J21TB6ZH?v=files.associations, Height (mm)=1.200, Item_Phase=Preliminary, Mounting Technology="Surface Mount (SMT)", Part_Name="IC, USB SWITCH, DPDT, 10MSOP, SMT", Part_Number=KH10970, Part_Type=IC, SchLibComponentName=FSUSB42UMX, Sourcing_View=https://app.bom.com/a/CUDJT0J0J21TB6ZH?v=sourcing.relationships, Specs_View=https://app.bom.com/a/CUDJT0J0J21TB6ZH?v=spec.summary, Type (IC)="Other Digital"
U2: library part KH10237, "..", Manufacturer1="Texas Instruments", Manufacturer_Part_Number1=LP5907MFX-3.3/NOPB, Bom_View=https://app.bom.com/a/L3MS29S9SBAIQWQT?v=bom.indented, Costing_View=https://app.bom.com/a/L3MS29S9SBAIQWQT?v=costing.summary, Files_View=https://app.bom.com/a/L3MS29S9SBAIQWQT?v=files.associations, Item_Phase=Production, Mounting Technology="Surface Mount (SMT)", Part_Name="IC, REG, LDO, 3.3V, 250mA, SOT-23, SMT", Part_Number=KH10237, Part_Type=IC, revision=1, SchLibComponentName=LP5907MFX-3.3, Sourcing_View=https://app.bom.com/a/L3MS29S9SBAIQWQT?v=sourcing.relationships, Specs_View=https://app.bom.com/a/L3MS29S9SBAIQWQT?v=spec.summary, Type (IC)=Power
U3 U4 U5: library part KH10130, "..", Manufacturer1=STMicroelectronics, Manufacturer_Part_Number1=USBLC6-2P6, Voltage - Reverse (V)=5.250, Bom_View=https://app.bom.com/a/SATZ9GZGZIHPX30P?v=bom.indented, Costing_View=https://app.bom.com/a/SATZ9GZGZIHPX30P?v=costing.summary, Distributor1=Digi-Key, Distributor_Part_Number1=497-5026-1-ND, Files_View=https://app.bom.com/a/SATZ9GZGZIHPX30P?v=files.associations, Item_Phase=Production, Mounting Technology="Surface Mount (SMT)", Part_Name="DIODE, TVS, 5.25VWM, 17VC, SOT666, SMT", Part_Number=KH10130, Part_Type=Diode, revision=1, SchLibComponentName=USBLC6-2P6, Sourcing_View=https://app.bom.com/a/SATZ9GZGZIHPX30P?v=sourcing.relationships, Specs_View=https://app.bom.com/a/SATZ9GZGZIHPX30P?v=spec.summary, Type (Diode)=TVS
U6: library part KH10944, Manufacturer1="Texas Instruments", Manufacturer_Part_Number1=LM74670QDGKRQ1, Package=MSOP8, Bom_View=https://app.bom.com/a/9RAGQXGXGZYTFY41?v=bom.indented, Costing_View=https://app.bom.com/a/9RAGQXGXGZYTFY41?v=costing.summary, Distributor1=Digi-Key, Distributor_Part_Number1=296-43171-6-ND, Files_View=https://app.bom.com/a/9RAGQXGXGZYTFY41?v=files.associations, Height (mm)=1.100, Item_Phase=Preliminary, Mounting Technology="Surface Mount (SMT)", Part_Name="IC, Controller, Smart Diode, MSOP-8, SMT", Part_Number=KH10944, Part_Type=IC, Pin Pitch (mm)=0.65, SchLibComponentName=ESC_BUCKLESS, Sourcing_View=https://app.bom.com/a/9RAGQXGXGZYTFY41?v=sourcing.relationships, Specs_View=https://app.bom.com/a/9RAGQXGXGZYTFY41?v=spec.summary, Type (IC)="Other Analog"

## Free pads (board coordinates)
  round 0 hole 2.4 unplated: 0(34.2,22.2) 0(34.2,11.075) 0(64.2,22.2)

## Via types
v1: diameter 0.508, hole 0.254, Top Layer to Bottom Layer, tented both sides, 199 vias

## Nets (pads, with @x,y where several pads share a name; then routed paths per layer and width w, separated by ;. In a path a pad name is that pad's centre, name@x,y a point inside that pad or via, vN(x,y) a via of type N, cw(c..) or ccw(c..) an arc to the next point about the centre after c; other vN are vias at no path point)
GND: C1.2 C2.2 C3.2 C4.2 C5.2 C6.2 C7.2 C8.2 C9.2 C10.2 C11.2 C12.2 C13.2 C14.2 C16.2 D4.2 D5.2 J1.4 J2.5 J3.5 J4.5 J5.0 J5.3 L1.1 L2.1 L3.1 L4.1 Q3.2 R1.2 R5.1 R6.1 R9.2 R10.1 R13.1 R14.2 R17.2 U1.5 U1.10 U2.2 U3.2 U4.2 U5.2 | length 9.7
  Top Layer w0.2: U5.2@12.095,4.8 12.6,4.8 12.9,4.5 12.9,3.9 ; 68.6,17.3 68.6,18.1 68.9,18.4 U4.2@69.405,18.4
  Top Layer w0.5: C16.2@18.1,24.1 18.85,24.1 R17.2@19.3,24.55 ; v1(18.3,23.3) 19,23.3 Q3.2@19.35,22.95 ; C3.2@37.8,18 38.3,18.5 U2.2@39.45,18.5
  Bottom Layer w0.2: U3.2@48.9,22.695 48.9,23.2 49.2,23.5 50.3,23.5
  other v1: 11.693,1.6 14.693,1.6 17.693,1.6 20.693,1.6 23.693,1.6 26.693,1.6 29.693,1.6 32.693,1.6 35.693,1.6 38.693,1.6 41.693,1.6 44.693,1.6 47.693,1.6 50.693,1.6 53.693,1.6 56.693,1.6 59.693,1.6 62.693,1.6 65.693,1.6 68.693,1.6 71.693,1.6 74.693,1.6 77.693,1.6 10,3.1 10.6,3.1 65.8,3.3 10,3.7 10.6,3.7 65.8,4.1 46.193,4.6 49.193,4.6 52.193,4.6 55.193,4.6 58.193,4.6 61.193,4.6 67.193,4.6 79.193,4.6 82.193,4.6 18.5,5.8 76.7,6.5 74.9,6.7 77.5,7.5 80.693,7.6 74.9,8.1 10.5,8.4 11.5,9.4 8.2,9.5 4.193,10.6 7.193,10.6 10.193,10.6 16.193,10.6 22.193,10.6 28.193,10.6 31.193,10.6 37.193,10.6 40.193,10.6 43.193,10.6 46.193,10.6 49.193,10.6 52.193,10.6 55.193,10.6 58.193,10.6 61.193,10.6 64.193,10.6 67.193,10.6 70.193,10.6 76.193,10.6 79.193,10.6 82.193,10.6 2.693,13.6 5.693,13.6 8.693,13.6 17.693,13.6 20.693,13.6 26.693,13.6 29.693,13.6 32.693,13.6 35.693,13.6 71.693,13.6 77.693,13.6 80.693,13.6 20,14.4 43.6,16.2 4.193,16.6 7.193,16.6 19.193,16.6 40.193,16.6 52.193,16.6 55.193,16.6 58.193,16.6 61.193,16.6 64.193,16.6 67.193,16.6 79.193,16.6 82.193,16.6 7.5,17.7 45.9,17.7 38.6,18.2 13.5,19.2 11.693,19.6 14.693,19.6 17.693,19.6 20.8,19.6 29.693,19.6 32.693,19.6 35.693,19.6 62.693,19.6 65.693,19.6 77.693,19.6 80.693,19.6 50.9,20.2 47.7,21.8 7.193,22.6 13.193,22.6 31.193,22.6 37.193,22.6 43.6,22.6 46.193,22.6 55.193,22.6 58.193,22.6 61.193,22.6 67.193,22.6 79.193,22.6 82.193,22.6 6,23 6.6,23 6,23.6 6.6,23.6 50.9,24.4 51.5,24.4 52.1,24.4 50.9,25 51.5,25 52.1,25 5.693,25.6 8.693,25.6 53.693,25.6 56.693,25.6 59.693,25.6 62.693,25.6 65.693,25.6 68.693,25.6 77.693,25.6 80.693,25.6 4.1,26.3 44.5,26.8
NetC2_1: C2.1 C12.1 R2.2 SW2.1 TP3.1 | length 9.4
  Top Layer w0.2: R2.2@13.55,20.8 16,20.8 v1(16.1,20.9) 16.1,20.6 16.1,17.72 C12.1@16.08,17.7
  Bottom Layer w0.2: C2.1@12.5,20.9 v1(16.1,20.9)
NetC3_1: C3.1 D2.3 R8.2 U2.1 U2.3 | length 11.8
  Top Layer w0.35: v1(38.6,19.4) C3.1@37.8,19.4 ; U2.3@39.45,17.55 40.2,17.55 40.5,17.85 40.5,18.8 40,19.3 40,19.45 ; R8.2@40,21 40,19.45 ; C3.1@37.8,19.4 v1(37,19.4) C3.1@37.8,19.4 ; C3.1@37.8,19.4 39.4,19.4 U2.1@39.45,19.45 40,19.45
  Bottom Layer w0.5: v1(37,19.4) v1(38.6,19.4) D2.3@39.6,19.4
NetC9_1: C9.1 C11.1 D5.1 J5.2 R16.2 | length 4.3
  Top Layer w0.5: C9.1@75.8,5.3 J5.2@77.8,5.3
  Top Layer w1: D5.1@73.5,5.25 73.55,5.3 C9.1@75.8,5.3
NetC13_1: C13.1 R11.1 R13.2 U1.2 | length 8.1
  Top Layer w0.2: R11.1@49.4,21.75 49.4,21 ; U1.2@50.9,18.2 50.108,18.2 49.8,18.508 49.8,20 49.4,20.4 49.4,21 ; R13.2@52.6,21.7 52.3,21.4 C13.1@51.1,21.4 50.3,21.4 49.9,21 49.4,21
NetC14_1: C14.1 D3.2 Q2.1 R12.1 R14.1 TP1.1 | length 14.2
  Top Layer w0.2: v1(13.4,11.2) 13.4,10.65 R12.1@13.35,10.6 13.35,9.65 C14.1@13.6,9.4 ; R14.1@13.45,8.2 13.45,9.25 C14.1@13.6,9.4 ; Q2.1@18.35,9.75 18,9.4 16.1,9.4 C14.1@13.6,9.4
  Bottom Layer w0.2: D3.2@10.8,14.425 10.8,11.6 11.8,10.6 12.8,10.6 v1(13.4,11.2)
NetC15_1: C15.1 U6.1 | length 2.6
  Top Layer w0.2: U6.1@28.275,24.125 28.275,23.025 28.5,22.8 C15.1@29.7,22.8
NetC15_2: C15.2 U6.7 | length 3.3
  Top Layer w0.2: U6.7@27.625,20.075 27.625,21.225 27.8,21.4 C15.2@29.7,21.4
NetC16_1: C16.1 Q3.1 R15.2 R17.1 TP5.1 | length 8.1
  Top Layer w0.2: TP5.1@16,25.5 C16.1@18.1,25.5 19.25,25.5 R17.1@19.3,25.45 20.05,25.45 20.3,25.2 ; Q3.1@21.25,22.95 21.25,24.05 20.3,25 20.3,25.2 ; R15.2@21.25,25.4 20.5,25.4 20.3,25.2
NetD1_2: D1.2 R1.1 SW1.2 TP2.1 | length 5.6
  Top Layer w0.2: v1(16.1,14.4) R1.1@18.45,14.4
  Bottom Layer w0.2: D1.2@12.8,14.4 SW1.2@15.05,14.4 v1(16.1,14.4)
NetJ1_0: J1.0 L2.2 | length 15.2
  Top Layer w0.6: J1.0@73.51,11.88 73.5,11.89 73.51,11.9 L2.2@75.5,11.9
  Bottom Layer w2: J1.0@73.51,11.88 J1.0@73.51,25.02
NetJ2_0: J2.0 L1.2 | length 1.2
  Top Layer w0.6: L1.2@45.5,26.1 J2.0@46.7,26.1
NetJ3_0: J3.0 L3.2 | length 1.2
  Bottom Layer w0.2: J3.0@8.85,2.2 L3.2@8.85,3.4
NetJ4_0: J4.0 L4.2 | length 1.1
  Top Layer w0.6: L4.2@4.8,25.3 4.8,24.25 J4.0@4.85,24.2
NetQ1_1: Q1.1 U6.2 U6.6 | length 6.5
  Top Layer w0.2: Q1.1@24.85,21.95 25.1,22.2 26.975,22.2 ; U6.6@26.975,20.075 26.975,22.2 ; U6.2@27.625,24.125 27.625,22.85 26.975,22.2
NetQ1_2: Q1.2 SW2.5 U6.4 | length 5.7
  Top Layer w0.2: 22.9,23.4 26.1,23.4 26.325,23.625 U6.4@26.325,24.125
  Bottom Layer w1.5: 22.9,23.4 SW2.5@24.55,23.4
  other v1: 22.6,23.1 23.2,23.1 22.6,23.7 23.2,23.7
NetQ2_3: Q2.3 SW1.1 TP6.1 | length 4.3
  Top Layer w0.2: v1(16.1,12) Q2.3@19.3,12
  Bottom Layer w0.2: SW1.1@15.05,11.86 15.09,11.9 v1(16.1,12)
NetQ3_3: Q3.3 R10.2 SW2.2 TP4.1 | length 6.6
  Top Layer w0.2: TP4.1@16.1,23 16.1,22.1 16.55,21.65 R10.2@18.1,21.65 18.95,21.65 19.6,21 20.25,21 Q3.3@20.3,21.05
  Bottom Layer w0.2: SW2.2@15.05,23.4 v1(16.1,23.4)
USB_iPad_n: U1.4 U4.4 | length 17.9
  Top Layer w0.2: U1.4@50.9,19.2 59.55,19.2 60.95,17.8 66.113,17.8 67.213,18.9 U4.4@67.795,18.9
USB_iPad_p: U1.3 U4.6 | length 17.7
  Top Layer w0.2: U1.3@50.925,18.7 51.725,18.7 51.875,18.85 59.405,18.85 60.805,17.45 66.258,17.45 66.708,17.9 U4.6@67.795,17.9
USB_iPad_R_n: J1.2 TP10.1 U4.3 | length 3.2
  Top Layer w0.2: U4.3@69.405,18.9 70.134,18.9 70.314,19.081 70.431,19.081 J1.2@70.8,19.45 TP10.1@72.4,19.45
USB_iPad_R_p: J1.3 TP11.1 U4.1 | length 3.3
  Top Layer w0.2: U4.1@69.405,17.9 70.117,17.9 70.4,17.617 70.633,17.617 J1.3@70.8,17.45 TP11.1@72.5,17.45
USB_Remote_n: U1.6 U5.6 | length 47.7
  Top Layer w0.2: U5.6@13.705,5.3 14.3,5.3 14.625,4.975 43.446,4.975 v1(43.6,5.129) ; v1(44.835,19.432) 45.103,19.7 U1.6@46.9,19.7
  Bottom Layer w0.2: v1(43.6,5.129) 43.754,4.975 44.2,4.975 44.5,5.275 44.5,19.097 v1(44.835,19.432)
USB_Remote_p: U1.7 U5.4 | length 47.3
  Top Layer w0.2: U5.4@13.705,4.3 14.3,4.3 14.625,4.625 43.446,4.625 v1(43.6,4.471) ; v1(45.3,18.966) 45.534,19.2 U1.7@46.9,19.2
  Bottom Layer w0.2: v1(43.6,4.471) 43.754,4.625 44.345,4.625 44.85,5.13 44.85,18.516 v1(45.3,18.966)
USB_Remote_R_n: J3.2 U5.1 | length 3.6
  Top Layer w0.2: J3.2@8.9,5.3 J3.2@8.85,5.35 9.625,5.35 10,4.975 11.175,4.975 11.5,5.3 U5.1@12.095,5.3
USB_Remote_R_p: J3.3 U5.3 | length 3.4
  Top Layer w0.2: J3.3@8.85,4.7 9.78,4.7 9.855,4.625 11.175,4.625 11.5,4.3 U5.3@12.095,4.3
USB_Usr_n: U1.8 U3.3 | length 5.7
  Top Layer w0.2: U1.8@46.875,18.7 U1.8@46.9,18.7 v1(48.2,18.7)
  Bottom Layer w0.2: v1(48.2,18.7) 48.725,19.225 48.725,21.775 48.4,22.1 U3.3@48.4,22.695
USB_Usr_p: U1.9 U3.1 | length 6.6
  Top Layer w0.2: U1.9@46.9,18.2 46.9,18.196 48.796,18.196 v1(48.8,18.2)
  Bottom Layer w0.2: v1(48.8,18.2) 49.075,18.475 49.075,21.775 49.4,22.1 U3.1@49.4,22.695
USB_Usr_R_n: J2.2 R3.1 R5.2 R7.2 TP7.1 U3.4 | length 6.4
  Top Layer w0.2: TP7.1@47.4,27.7 R5.2@48.4,27.7 48.5,27.6 v1(48.5,27.1) 48.5,26.5 R7.2@48.4,26.4 R3.1@48.4,25.3
  Bottom Layer w0.2: U3.4@48.4,24.305 48.4,25 48.55,25.15 J2.2@48.55,26.1 48.55,27.05 v1(48.5,27.1)
USB_Usr_R_p: J2.3 R4.1 R6.2 R7.1 TP9.1 U3.6 | length 6.4
  Top Layer w0.2: R4.1@49.4,25.3 R7.1@49.4,26.4 49.3,26.5 v1(49.3,27.1) 49.3,27.6 R6.2@49.4,27.7 TP9.1@50.4,27.7
  Bottom Layer w0.2: v1(49.3,27.1) 49.2,27 J2.3@49.2,26.1 49.2,25.2 49.4,25 U3.6@49.4,24.305
V_3p3: C4.1 C10.1 R8.1 U1.1 U2.5 | length 12.6
  Top Layer w0.35: R8.1@41.6,21 41.6,20 U2.5@42.15,19.45 42.2,19.4 C10.1@43.6,19.4 C4.1@43.6,18.3 44.3,18.3 45.7,16.9 49,16.9 49.8,17.7 U1.1@50.9,17.7